# Altium PCB FPGA_Rack_v1_0.PcbDoc (part 2 of 5)
Units mil, origin at the board's own origin, x right, y up, seen from the top; angles counter-clockwise.
Board outline 6299.21 x 3937.01 mil, 8 copper layers (Top Layer, Top, Internal Plane 2, Vcc 3.3V, Internal Plane 1, Gnd, Mid-Layer 1, SIG1, Mid-Layer 2, SIG3, Mid-Layer 3, SIG2, Mid-Layer 4, SIG4, Bottom Layer, Bottom), stack 74.2 mil thick; 215 components, 379 nets, 1713 pads, 1076 vias.
Unrouted connection lines stored in the file: 1.
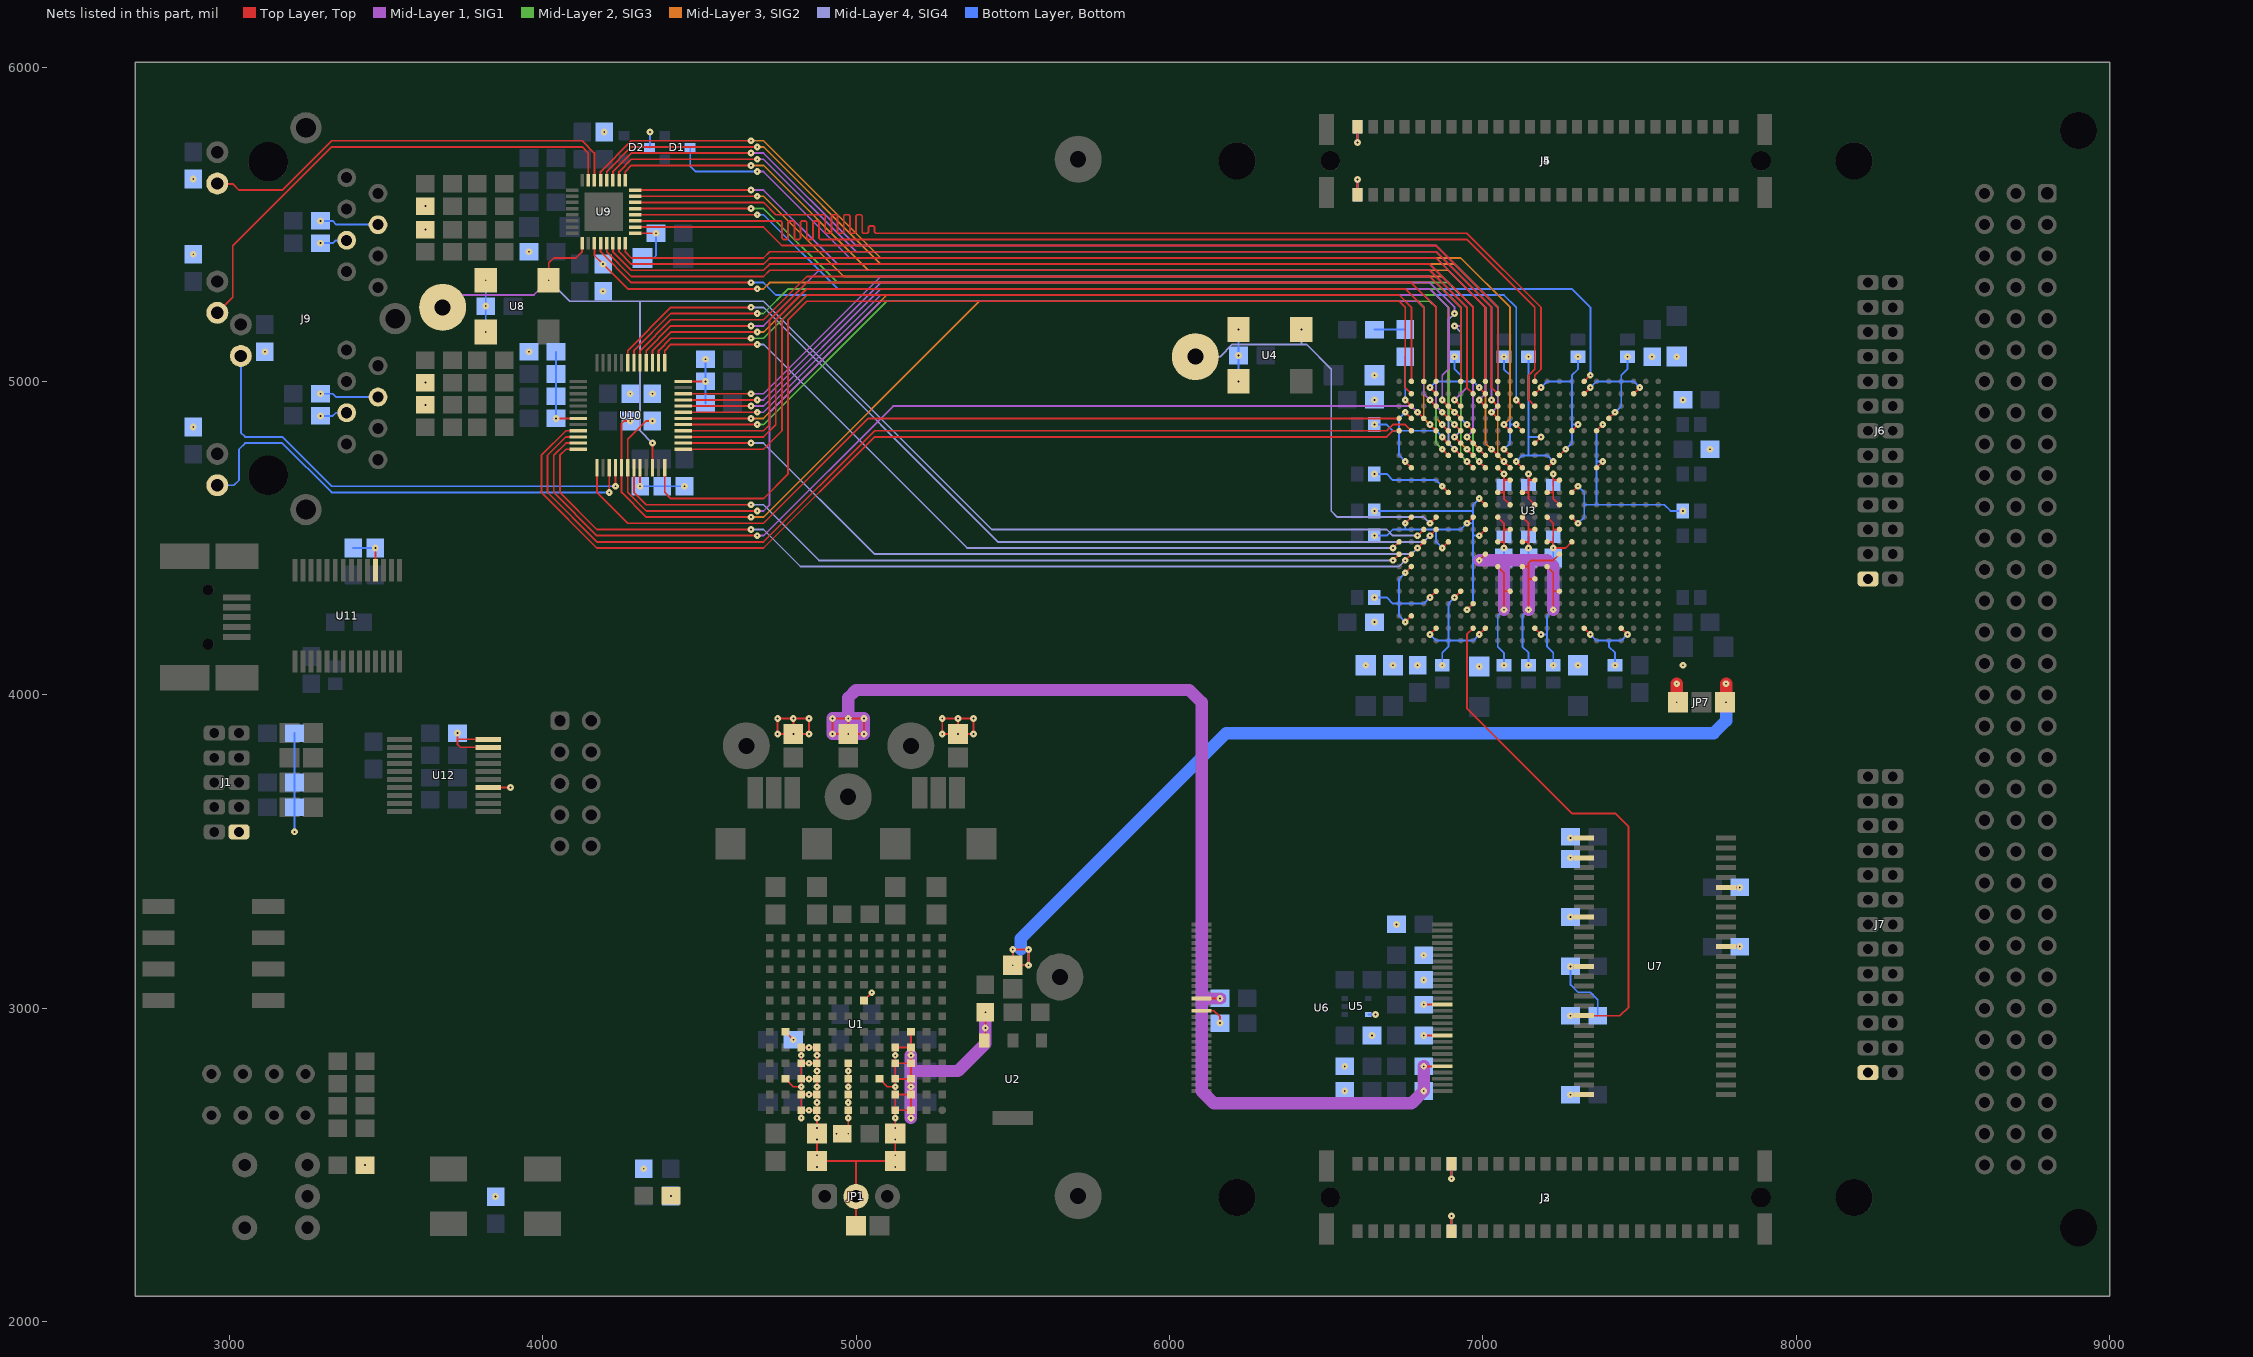
[diagram p8: the nets of this part, all layers, seen from the top]

## Footprints (in the part's own frame and the unit in brackets; to place one, negate y for a bottom-side part, rotate by r counter-clockwise, add the part's x,y. Pads: shape width x height; smd on the part's side, far side on the other; paste and mask are expansions set on the pad) (continued)
CONN2X5 [mil]
  rrect50% 60x60 hole 35.43: 1(0,0)
  round 60 hole 35.43: 2(0,-100) 3(-100,0) 4(-100,-100) 5(-200,0) 6(-200,-100) 7(-300,0) 8(-300,-100) 9(-400,0) 10(-400,-100)
  silkscreen extent -612,-237 213,138
CONN2X5-2MM-FCI-COUDE [mm]
  rrect50% 1.219x1.727 hole 0.8: 1(0,0) 2(0,2) 3(2,0) 4(2,2) 5(4,0) 6(4,2) 7(6,0) 8(6,2) 9(8,0) 10(8,2)
  silkscreen extent -2.3,-1.1 10.3,8.3
CONN3X32_DIN41612-3X32FC(Primary) [mil]
  rrect50% 60x60 hole 39.37: 1a(0,0)
  round 60 hole 35.43: 1b(-100,0) 1c(-200,0) 2a(0,-100) 2b(-100,-100) 2c(-200,-100) 3a(0,-200) 3b(-100,-200) 3c(-200,-200) 4a(0,-300) 4b(-100,-300) 4c(-200,-300) 5a(0,-400) 5b(-100,-400) 5c(-200,-400) 6a(0,-500) 6b(-100,-500) 6c(-200,-500) 7a(0,-600) 7b(-100,-600) 7c(-200,-600) 8a(0,-700) 8b(-100,-700) 8c(-200,-700) 9a(0,-800) 9b(-100,-800) 9c(-200,-800) 10a(0,-900) 10b(-100,-900) 10c(-200,-900) 11a(0,-1000) 11b(-100,-1000) 11c(-200,-1000) 12a(0,-1100) 12b(-100,-1100) 12c(-200,-1100) 13a(0,-1200) 13b(-100,-1200) 13c(-200,-1200) 14a(0,-1300) 14b(-100,-1300) 14c(-200,-1300) 15a(0,-1400) 15b(-100,-1400) 15c(-200,-1400) 16a(0,-1500) 16b(-100,-1500) 16c(-200,-1500) 17a(0,-1600) 17b(-100,-1600) 17c(-200,-1600) 18a(0,-1700) 18b(-100,-1700) 18c(-200,-1700) 19a(0,-1800) 19b(-100,-1800) 19c(-200,-1800) 20a(0,-1900) 20b(-100,-1900) 20c(-200,-1900) 21a(0,-2000) 21b(-100,-2000) 21c(-200,-2000) 22a(0,-2100) 22b(-100,-2100) 22c(-200,-2100) 23a(0,-2200) 23b(-100,-2200) 23c(-200,-2200) 24a(0,-2300) 24b(-100,-2300) 24c(-200,-2300) 25a(0,-2400) 25b(-100,-2400) 25c(-200,-2400) 26a(0,-2500) 26b(-100,-2500) 26c(-200,-2500) 27a(0,-2600) 27b(-100,-2600) 27c(-200,-2600) 28a(0,-2700) 28b(-100,-2700) 28c(-200,-2700) 29a(0,-2800) 29b(-100,-2800) 29c(-200,-2800) 30a(0,-2900) 30b(-100,-2900) 30c(-200,-2900) 31a(0,-3000) 31b(-100,-3000) 31c(-200,-3000) 32a(0,-3100) 32b(-100,-3100) 32c(-200,-3100)
  round 118.11 hole 118.11 paste-1000 mask-1000: 97(100,200) 98(100,-3300)
  silkscreen extent -244,-3412 512,312
ERNI-SMC-50P-FD_ERNI-SMC-50P-FD(Primary) [mm]
  rect 2.5x1.2 smd: 51(-2.55,17.75) 52(2.55,17.75) 53(-2.55,-17.75) 54(2.55,-17.75)
  round 1.6 hole 1.6 paste-25.4 mask-25.4: 55(0,17.45) 56(0,-17.45)
  rect 1.1x0.8 smd: a1(-2.75,15.24) a2(-2.75,13.97) a3(-2.75,12.7) a4(-2.75,11.43) a5(-2.75,10.16) a6(-2.75,8.89) a7(-2.75,7.62) a8(-2.75,6.35) a9(-2.75,5.08) a10(-2.75,3.81) a11(-2.75,2.54) a12(-2.75,1.27) a13(-2.75,0) a14(-2.75,-1.27) a15(-2.75,-2.54) a16(-2.75,-3.81) a17(-2.75,-5.08) a18(-2.75,-6.35) a19(-2.75,-7.62) a20(-2.75,-8.89) a21(-2.75,-10.16) a22(-2.75,-11.43) a23(-2.75,-12.7) a24(-2.75,-13.97) a25(-2.75,-15.24) b1(2.75,15.24) b2(2.75,13.97) b3(2.75,12.7) b4(2.75,11.43) b5(2.75,10.16) b6(2.75,8.89) b7(2.75,7.62) b8(2.75,6.35) b9(2.75,5.08) b10(2.75,3.81) b11(2.75,2.54) b12(2.75,1.27) b13(2.75,0) b14(2.75,-1.27) b15(2.75,-2.54) b16(2.75,-3.81) b17(2.75,-5.08) b18(2.75,-6.35) b19(2.75,-7.62) b20(2.75,-8.89) b21(2.75,-10.16) b22(2.75,-11.43) b23(2.75,-12.7) b24(2.75,-13.97) b25(2.75,-15.24)
  silkscreen extent -4.13,-19.37 4.13,19.45
ERNI-SMC-50P-MD_ERNI-SMC-50P-MD(Primary) [mm]
  rect 2.5x1.2 smd: 51(2.55,17.75) 52(-2.55,17.75) 53(2.55,-17.75) 54(-2.55,-17.75)
  round 1.6 hole 1.6 paste-25.4 mask-25.4: 55(0,17.45) 56(0,-17.45)
  rect 1.1x0.8 smd: a1(2.75,15.24) a2(2.75,13.97) a3(2.75,12.7) a4(2.75,11.43) a5(2.75,10.16) a6(2.75,8.89) a7(2.75,7.62) a8(2.75,6.35) a9(2.75,5.08) a10(2.75,3.81) a11(2.75,2.54) a12(2.75,1.27) a13(2.75,0) a14(2.75,-1.27) a15(2.75,-2.54) a16(2.75,-3.81) a17(2.75,-5.08) a18(2.75,-6.35) a19(2.75,-7.62) a20(2.75,-8.89) a21(2.75,-10.16) a22(2.75,-11.43) a23(2.75,-12.7) a24(2.75,-13.97) a25(2.75,-15.24) b1(-2.75,15.24) b2(-2.75,13.97) b3(-2.75,12.7) b4(-2.75,11.43) b5(-2.75,10.16) b6(-2.75,8.89) b7(-2.75,7.62) b8(-2.75,6.35) b9(-2.75,5.08) b10(-2.75,3.81) b11(-2.75,2.54) b12(-2.75,1.27) b13(-2.75,0) b14(-2.75,-1.27) b15(-2.75,-2.54) b16(-2.75,-3.81) b17(-2.75,-5.08) b18(-2.75,-6.35) b19(-2.75,-7.62) b20(-2.75,-8.89) b21(-2.75,-10.16) b22(-2.75,-11.43) b23(-2.75,-12.7) b24(-2.75,-13.97) b25(-2.75,-15.24)
  silkscreen extent -3.97,-18.57 3.97,19.27
JUMPER3 [mil]
  rrect50% 80x80 hole 39.37: 1(0,0)
  round 80 hole 39.37: 2(100,0) 3(200,0)
  silkscreen extent -56,-56 256,56
JUMPER-SMD [mil]
  rect 63x63 smd: 1(0,0) 2(75,0)
  silkscreen extent -38,-38 112,38
JUMPER-SMD3 [mil]
  rect 64x64 smd: 1(-75,0) 2(0,0) 3(75,0)
  silkscreen extent -119,-44 119,44
L0805-MM [mil]
  rect 60x56 smd: 1(0,0) 2(86.61,0)
  silkscreen extent -39,-35 126,35
LED-569-010X-XXX [mil]
  round 60 hole 31.5: 1(543.75,66) 2(443.75,66) 3(343.75,66) 4(243.75,66) 5(543.75,-66) 6(443.75,-66) 7(343.75,-66) 8(243.75,-66)
  silkscreen extent -162,-144 600,144
LED_SMD0805-MM [mil]
  rect 56x60 smd: 1(0,0) 2(0,86.61)
  silkscreen extent -35,-39 35,126
LGA144_15X15MM [mm]
  round 0.63 smd: 1(0,0)
  rect 0.63x0.63 smd: 2(1.27,0) 3(2.54,0) 4(3.81,0) 5(5.08,0) 6(6.35,0) 7(7.62,0) 8(8.89,0) 9(10.16,0) 10(11.43,0) 11(12.7,0) 12(13.97,0) 13(0,1.27) 14(1.27,1.27) 15(2.54,1.27) 16(3.81,1.27) 17(5.08,1.27) 18(6.35,1.27) 19(7.62,1.27) 20(8.89,1.27) 21(10.16,1.27) 22(11.43,1.27) 23(12.7,1.27) 24(13.97,1.27) 25(0,2.54) 26(1.27,2.54) 27(2.54,2.54) 28(3.81,2.54) 29(5.08,2.54) 30(6.35,2.54) 31(7.62,2.54) 32(8.89,2.54) 33(10.16,2.54) 34(11.43,2.54) 35(12.7,2.54) 36(13.97,2.54) 37(0,3.81) 38(1.27,3.81) 39(2.54,3.81) 40(3.81,3.81) 41(5.08,3.81) 42(6.35,3.81) 43(7.62,3.81) 44(8.89,3.81) 45(10.16,3.81) 46(11.43,3.81) 47(12.7,3.81) 48(13.97,3.81) 49(0,5.08) 50(1.27,5.08) 51(2.54,5.08) 52(3.81,5.08) 53(5.08,5.08) 54(6.35,5.08) 55(7.62,5.08) 56(8.89,5.08) 57(10.16,5.08) 58(11.43,5.08) 59(12.7,5.08) 60(13.97,5.08) 61(0,6.35) 62(1.27,6.35) 63(2.54,6.35) 64(3.81,6.35) 65(5.08,6.35) 66(6.35,6.35) 67(7.62,6.35) 68(8.89,6.35) 69(10.16,6.35) 70(11.43,6.35) 71(12.7,6.35) 72(13.97,6.35) 73(0,7.62) 74(1.27,7.62) 75(2.54,7.62) 76(3.81,7.62) 77(5.08,7.62) 78(6.35,7.62) 79(7.62,7.62) 80(8.89,7.62) 81(10.16,7.62) 82(11.43,7.62) 83(12.7,7.62) 84(13.97,7.62) 85(0,8.89) 86(1.27,8.89) 87(2.54,8.89) 88(3.81,8.89) 89(5.08,8.89) 90(6.35,8.89) 91(7.62,8.89) 92(8.89,8.89) 93(10.16,8.89) 94(11.43,8.89) 95(12.7,8.89) 96(13.97,8.89) 97(0,10.16) 98(1.27,10.16) 99(2.54,10.16) 100(3.81,10.16) 101(5.08,10.16) 102(6.35,10.16) 103(7.62,10.16) 104(8.89,10.16) 105(10.16,10.16) 106(11.43,10.16) 107(12.7,10.16) 108(13.97,10.16) 109(0,11.43) 110(1.27,11.43) 111(2.54,11.43) 112(3.81,11.43) 113(5.08,11.43) 114(6.35,11.43) 115(7.62,11.43) 116(8.89,11.43) 117(10.16,11.43) 118(11.43,11.43) 119(12.7,11.43) 120(13.97,11.43) 121(0,12.7) 122(1.27,12.7) 123(2.54,12.7) 124(3.81,12.7) 125(5.08,12.7) 126(6.35,12.7) 127(7.62,12.7) 128(8.89,12.7) 129(10.16,12.7) 130(11.43,12.7) 131(12.7,12.7) 132(13.97,12.7) 133(0,13.97) 134(1.27,13.97) 135(2.54,13.97) 136(3.81,13.97) 137(5.08,13.97) 138(6.35,13.97) 139(7.62,13.97) 140(8.89,13.97) 141(10.16,13.97) 142(11.43,13.97) 143(12.7,13.97) 144(13.97,13.97)
  silkscreen extent -0.81,-0.81 14.78,14.78
LQFP48-P0.5-L7-C7 [mm]
  rect 1.4x0.25 smd: 1(0,0) 2(0,-0.5) 3(0,-1) 4(0,-1.5) 5(0,-2) 6(0,-2.5) 7(0,-3) 8(0,-3.5) 9(0,-4) 10(0,-4.5) 11(0,-5) 12(0,-5.5) 25(8.5,-5.5) 26(8.5,-5) 27(8.5,-4.5) 28(8.5,-4) 29(8.5,-3.5) 30(8.5,-3) 31(8.5,-2.5) 32(8.5,-2) 33(8.5,-1.5) 34(8.5,-1) 35(8.5,-0.5) 36(8.5,0)
  rect 0.25x1.4 smd: 13(1.5,-7) 14(2,-7) 15(2.5,-7) 16(3,-7) 17(3.5,-7) 18(4,-7) 19(4.5,-7) 20(5,-7) 21(5.5,-7) 22(6,-7) 23(6.5,-7) 24(7,-7) 37(7,1.5) 38(6.5,1.5) 39(6,1.5) 40(5.5,1.5) 41(5,1.5) 42(4.5,1.5) 43(4,1.5) 44(3.5,1.5) 45(3,1.5) 46(2.5,1.5) 47(2,1.5) 48(1.5,1.5)
  silkscreen extent -1.1,-8.1 9.6,2.6
NFE31P [mm]
  rect 1.27x2.54 smd: 1(0,0) 2(1.51,0) 3(3.02,0)
  silkscreen extent -1.02,-1.59 4.06,1.59
OSCILL-VX3 [mm]
  rect 1.8x2 smd: 1(0,0) 2(5.08,0) 3(5.08,4.2) 4(0,4.2)
  silkscreen extent -1.27,-1.27 6.35,5.4
PUSHBUTT-DTSM [mm]
  rect 3x2 smd: 1(0,0) 2(7.62,0) 3(0,-4.445) 4(7.62,-4.445)
  silkscreen extent -1.75,-5.71 9.37,1.27
PUSHBUTTON-03_PUSHBUTT-SH3-01(Primary) [mil]
  round 80 hole 39.37: 4(0,200) 5(200,200) C(100,0) NC(0,0) NO(200,0)
  silkscreen extent -50,-50 250,700
"QFN32 5X5" [mm]
  rect 1x0.28 smd: 1(0,0) 2(0,-0.5) 3(0,-1) 4(0,-1.5) 5(0,-2) 6(0,-2.5) 7(0,-3) 8(0,-3.5) 17(5.1,-3.5) 18(5.1,-3) 19(5.1,-2.5) 20(5.1,-2) 21(5.1,-1.5) 22(5.1,-1) 23(5.1,-0.5) 24(5.1,0)
  rect 0.28x1 smd: 9(0.8,-4.3) 10(1.3,-4.3) 11(1.8,-4.3) 12(2.3,-4.3) 13(2.8,-4.3) 14(3.3,-4.3) 15(3.8,-4.3) 16(4.3,-4.3) 25(4.3,0.8) 26(3.8,0.8) 27(3.3,0.8) 28(2.8,0.8) 29(2.3,0.8) 30(1.8,0.8) 31(1.3,0.8) 32(0.8,0.8)
  rect 3.1x3.1 smd: 33(2.55,-1.75)
  silkscreen extent -0.7,-5 5.8,1.5
RC0603-MM [mm]
  rect 1x1.2 smd: 1(0,0) 2(1.4,0)
  silkscreen extent -0.7,-0.8 2.1,0.8
RC0603/0805 [mm]
  rect 1.6x1.4 smd: 1(0,0) 2(2.064,0)
  silkscreen extent -0.95,-0.95 3.02,0.95
RC0805-MM [mil]
  rect 60x56 smd: 1(0,0) 2(86.61,0)
  silkscreen extent -39,-35 126,35
RJ45-PULSE-J8064D628ANL [mil]
  round 60 hole 35.43: 1(-450,675) 2(-400,775) 3(-350,675) 4(-300,775) 5(-250,675) 6(-200,775) 7(-150,675) 8(-100,775) 13(100,675) 14(150,775) 15(200,675) 16(250,775) 17(300,675) 18(350,775) 19(400,675) 20(450,775)
  round 70 hole 39.37: 9(-531.25,262.5) 10(-431.25,262.5) 11(-118.75,262.5) 12(-18.75,262.5) 21(18.75,337.5) 22(118.75,337.5) 23(431.25,262.5) 24(531.25,262.5)
  round 100 hole 63: 25(-609,545) 26(0,830) 27(609,545)
  round 125.98 hole 125.98 paste-1000 mask-1000: 28(-500,425) 29(500,425)
  silkscreen extent -669,-13 669,888
SC70-5 [mm]
  rect 0.5x0.4 smd: 1(0,0) 2(0,-0.65) 3(0,-1.3) 4(1.9,-1.3) 5(1.9,0)
  silkscreen extent -0.48,-1.91 2.38,0.64
SOT23 [mil]
  rect 35x30 smd: 1(0,0) 2(0,-75) 3(81.25,-37.5)
  silkscreen extent -25,-100 106,25
SOT223 [mil]
  rect 130x45 smd: 1(0,0)
  rect 35x45 smd: 2(-91,-248) 3(91,-248) 4(0,-248)
  silkscreen extent -132,-286 133,36
SSOP20 [mil]
  rect 80x16 smd: 1(0,0) 2(0,-25.59) 3(0,-51.18) 4(0,-76.77) 5(0,-102.36) 6(0,-127.95) 7(0,-153.54) 8(0,-179.13) 9(0,-204.72) 10(0,-230.32) 11(283.46,-230.32) 12(283.46,-204.72) 13(283.46,-179.13) 14(283.46,-153.54) 15(283.46,-127.95) 16(283.46,-102.36) 17(283.46,-76.77) 18(283.46,-51.18) 19(283.46,-25.59) 20(283.46,0)
  silkscreen extent -47,-276 331,47
SSOP28-P0.65-L10.2-C5.4 [mm]
  rect 1.8x0.4 smd: 1(0,0) 2(0,-0.65) 3(0,-1.3) 4(0,-1.95) 5(0,-2.6) 6(0,-3.25) 7(0,-3.9) 8(0,-4.55) 9(0,-5.2) 10(0,-5.85) 11(0,-6.5) 12(0,-7.15) 13(0,-7.8) 14(0,-8.45) 15(7.4,-8.45) 16(7.4,-7.8) 17(7.4,-7.15) 18(7.4,-6.5) 19(7.4,-5.85) 20(7.4,-5.2) 21(7.4,-4.55) 22(7.4,-3.9) 23(7.4,-3.25) 24(7.4,-2.6) 25(7.4,-1.95) 26(7.4,-1.3) 27(7.4,-0.65) 28(7.4,0)
  silkscreen extent -1.2,-9.6 8.6,1.2
SW-CTS-193-4MS [mm]
  rect 1.2x2.6 smd: 1(0,0) 2(2.54,0) 3(5.08,0) 4(7.62,0) 5(7.62,8.89) 6(5.08,8.89) 7(2.54,8.89) 8(0,8.89)
  silkscreen extent -2.7,-1.91 10.32,10.48
TC7343_CAPS7343P(TAJ-D)(Primary) [mil]
  rect 96x102 smd: MINUS(275,0) PLUS(0,0)
  silkscreen extent -75,-100 331,100
TSOP54 [mil]
  rect 64x16 smd: 1(0,0) 2(0,-31.5) 3(0,-62.99) 4(0,-94.49) 5(0,-125.98) 6(0,-157.48) 7(0,-188.98) 8(0,-220.47) 9(0,-251.97) 10(0,-283.46) 11(0,-314.96) 12(0,-346.46) 13(0,-377.95) 14(0,-409.45) 15(0,-440.94) 16(0,-472.44) 17(0,-503.94) 18(0,-535.43) 19(0,-566.93) 20(0,-598.43) 21(0,-629.92) 22(0,-661.42) 23(0,-692.91) 24(0,-724.41) 25(0,-755.91) 26(0,-787.4) 27(0,-818.9) 28(452.76,-818.9) 29(452.76,-787.4) 30(452.76,-755.91) 31(452.76,-724.41) 32(452.76,-692.91) 33(452.76,-661.42) 34(452.76,-629.92) 35(452.76,-598.43) 36(452.76,-566.93) 37(452.76,-535.43) 38(452.76,-503.94) 39(452.76,-472.44) 40(452.76,-440.94) 41(452.76,-409.45) 42(452.76,-377.95) 43(452.76,-346.46) 44(452.76,-314.96) 45(452.76,-283.46) 46(452.76,-251.97) 47(452.76,-220.47) 48(452.76,-188.98) 49(452.76,-157.48) 50(452.76,-125.98) 51(452.76,-94.49) 52(452.76,-62.99) 53(452.76,-31.5) 54(452.76,0)
  silkscreen extent -39,-870 492,51
TSOP56 [mil]
  rect 64x12 smd: 1(0,0) 2(0,-19.68) 3(0,-39.37) 4(0,-59.06) 5(0,-78.74) 6(0,-98.43) 7(0,-118.11) 8(0,-137.8) 9(0,-157.48) 10(0,-177.17) 11(0,-196.85) 12(0,-216.54) 13(0,-236.22) 14(0,-255.91) 15(0,-275.59) 16(0,-295.28) 17(0,-314.96) 18(0,-334.65) 19(0,-354.33) 20(0,-374.02) 21(0,-393.7) 22(0,-413.39) 23(0,-433.07) 24(0,-452.76) 25(0,-472.44) 26(0,-492.13) 27(0,-511.81) 28(0,-531.5) 29(767.72,-531.5) 30(767.72,-511.81) 31(767.72,-492.13) 32(767.72,-472.44) 33(767.72,-452.76) 34(767.72,-433.07) 35(767.72,-413.39) 36(767.72,-393.7) 37(767.72,-374.02) 38(767.72,-354.33) 39(767.72,-334.65) 40(767.72,-314.96) 41(767.72,-295.28) 42(767.72,-275.59) 43(767.72,-255.91) 44(767.72,-236.22) 45(767.72,-216.54) 46(767.72,-196.85) 47(767.72,-177.17) 48(767.72,-157.48) 49(767.72,-137.8) 50(767.72,-118.11) 51(767.72,-98.43) 52(767.72,-78.74) 53(767.72,-59.06) 54(767.72,-39.37) 55(767.72,-19.68) 56(767.72,0)
  silkscreen extent -39,-555 807,24
"UNCONNECTED NUT M2.5" [mm]
  round 3 hole 3 paste-25.4 mask-25.4: 1(0,0)
  Top Layer, Top keep-out region: -3.5,0 -3.031,-1.75 -1.75,-3.031 0,-3.5 1.75,-3.031 3.031,-1.75 3.5,0 3.031,1.75 1.75,3.031 0,3.5 -1.75,3.031 -3.031,1.75
  Bottom Layer, Bottom keep-out region: -3.5,0 -3.031,-1.75 -1.75,-3.031 0,-3.5 1.75,-3.031 3.031,-1.75 3.5,0 3.031,1.75 1.75,3.031 0,3.5 -1.75,3.031 -3.031,1.75
  silkscreen extent -3,-3 3,3
USB-MINI-B-SMD [mm]
  rect 2.25x0.5 smd: 1(8.225,1.6) 2(8.225,0.8) 3(8.225,0) 4(8.225,-0.8) 5(8.225,-1.6)
  rect 3.5x2.05 smd: 6(8.25,-4.925) 8(8.25,4.925)
  rect 4x2.05 smd: 7(4,-4.925) 9(4,4.925)
  round 0.9 hole 0.9 paste-25.4 mask-25.4: 10(5.9,2.2) 11(5.9,-2.2)
  Top Layer, Top keep-out lines w0.254: 2,-3.1 3.2,-3.1 3.2,3.1 2,3.1 2,-3.1
  silkscreen extent -0.3,-6.2 10.2,6.2

## Part data
C1 C2 C3 C4 C5 C6 C7 C10 C11 C12 C13 C14 C17 C18 C19 C20 C21 C22 C23 C24 C25 C26 C27 C28 C29 C30 C31 C32 C33 C34 C35 C36 C37 C38 C39 C40 C41 C42 C43 C44 C45 C46 C47 C48 C49 C50 C51 C52 C53 C54 C55 C56 C57 C58 C59 C60 C61 C62 C63 C64 C65 C66 C67 C68 C69 C70 C71 C72 C73 C74 C75 C76 C77 C78 C79 C80 C81 C82 C83 C84 C85 C86 C87 C88 C89 C90 C91 C92 C93 C94 C95 C96 C97 C98 C99 C100 C101 C102 C103 C104 C105 C106 C107: "Capacitor"
C8 C9: "Valable pour formats 0805 et 1206"
J2 J4: "Connecteur Smd serie SMC pas 1.27 ERNI - Distrelec 12 06 39"
J3 J5: "Connecteur Smd serie SMC pas 1.27 ERNI - Distrelec 12 06 42"
J9: "Integrated connector modules 10/100 base-TX belMag with LEDs .  Reselec N° 0810-1X1T-03"
J10: "Farnell no 1125-348 / Molex SD-67503-010"
L1 L2: "Self de choc SMD - Murata"
LC1 LC2: "EMI filter - TDK"
LD1: "Led smd - Stanley Distrelec N° 25 31 00"
LD2: "LED Schurter - Distrelec 25 09 08..."
R1 R2 R3 R4 R5 R6: "Valable pour format 0805 et 1206"
R39: "Resistor"
S1: "ITW Switches JPM 1990-0101 / Distrelec 20 15 40"
S2: "Pushbutton NO Schurter type SMS J-leads"
SW1: "Dip switch smd 4 poles - Thomas & Betts - Distrelec 21 04 21"
U2: "3A Low Dropout positive Regulator"
U4 U8: "Oscillator serie VX3 - Jauch - Distrelec 68 03 82 .. 68 04 00"
U5: "HS Inverter - Fairchild"
U6 U7: "SDRAM 64Mb x 16 - Micron"
U9: "Quadrature Decoder/Counter interface ICs - Agilent Technologies"
U11: "24-Bit ADC with Ultra Low Noise PGIA - Crystal"
U12: "+/- 15kV ESD-Protected, 1uA, 1Mbps, 3.0V to 5.5V, RS-232 Transceiver with AutoShutdown Plus"

## Via types
v1: diameter 21.65, hole 5.91, Top Layer, Top to Bottom Layer, Bottom, 1076 vias

## Nets (pads, with @x,y where several pads share a name; then routed paths per layer and width w, separated by ;. In a path a pad name is that pad's centre, name@x,y a point inside that pad or via, vN(x,y) a via of type N, cw(c..) or ccw(c..) an arc to the next point about the centre after c; other vN are vias at no path point)
1.2V: C23.2 C28.2 C29.2 C34.2 C36.2 C37.2 C42.2 C47.2 C52.2 C57.2 C58.2 JP5.2 U3.J8 U3.J10 U3.J12 U3.J14 U3.K9 U3.K11 U3.K13 U3.L10 U3.L12 U3.L14 U3.M9 U3.M11 U3.M13 U3.N10 U3.N12 U3.N14 U3.P9 U3.P11 U3.P13 U3.R14 | length 1627.8
  Top Layer, Top w5.91: U3.J14@7047.24,4488.19 7066.93,4488.19 ; U3.L14@7047.24,4566.93 7066.93,4547.24 7066.93,4527.56 ; U3.N14@7047.24,4645.67 7066.93,4645.67 ; U3.R14@7047.24,4724.41 v1(7066.93,4704.72) 7066.93,4685.04 ; v1(7066.93,4468.5) 7066.93,4488.19 ; U3.K13@7086.61,4527.56 7066.93,4527.56 ; U3.M13@7086.61,4606.3 7066.93,4625.98 7066.93,4645.67 ; U3.P13@7086.61,4685.04 7066.93,4685.04 ; U3.J12@7125.98,4488.19 7145.67,4488.19 ; U3.L12@7125.98,4566.93 7145.67,4547.24 7145.67,4527.56 ; U3.N12@7125.98,4645.67 7145.67,4645.67 ; v1(7145.67,4468.5) 7145.67,4488.19 ; v1(7145.67,4704.72) 7145.67,4685.04 ; U3.K11@7165.35,4527.56 7145.67,4527.56 ; U3.M11@7165.35,4606.3 7145.67,4625.98 7145.67,4645.67 ; U3.P11@7165.35,4685.04 7145.67,4685.04 ; U3.J10@7204.72,4488.19 7224.41,4488.19 ; U3.L10@7204.72,4566.93 7224.41,4547.24 7224.41,4527.56 ; U3.N10@7204.72,4645.67 7224.41,4645.67 ; v1(7224.41,4704.72) 7224.41,4685.04 ; U3.K9@7244.09,4527.56 7224.41,4527.56 ; U3.M9@7244.09,4606.3 7224.41,4625.98 7224.41,4645.67 ; U3.P9@7244.09,4685.04 7224.41,4685.04 ; U3.J8@7283.46,4488.19 7263.78,4468.5 v1(7224.41,4468.5) 7224.41,4488.19 ; v1(5325,3875) v1(5325,3925) ; v1(5325,3875) v1(5275,3875) v1(5275,3925) v1(5325,3925) ; v1(5325,3875) v1(5375,3875) v1(5375,3925) v1(5325,3925) ; 7066.93,4488.19 7066.93,4527.56 ; 7066.93,4645.67 7066.93,4685.04 ; 7145.67,4488.19 7145.67,4527.56 ; 7145.67,4645.67 7145.67,4685.04 ; 7224.41,4488.19 7224.41,4527.56 ; 7224.41,4645.67 7224.41,4685.04
  Bottom Layer, Bottom w5.91: C29.2@7066.93,4437.01 v1(7066.93,4468.5) C37.2@7066.93,4503.94 ; C52.2@7066.93,4669.29 v1(7066.93,4704.72) ; C36.2@7145.67,4437.01 v1(7145.67,4468.5) C42.2@7145.67,4503.94 ; C57.2@7145.67,4669.29 v1(7145.67,4704.72) ; C34.2@7224.41,4437.01 v1(7224.41,4468.5) C47.2@7224.41,4503.94 ; C58.2@7224.41,4669.29 v1(7224.41,4704.72)
  other v1: 6988.19,4090.55 7303.15,4094.49
1.8V: C62.2 C64.2 C66.2 JP3.2 U6.13 U6.33 | length 4157.1
  Top Layer, Top w5.91: U6.13@6102.36,3031.5 v1(6161.42,3031.5) ; v1(6811.02,2814.96) U6.33@6870.08,2814.96 ; v1(4975,3875) v1(4975,3925) ; v1(4975,3875) v1(4925,3875) v1(4925,3925) v1(4975,3925) ; v1(4975,3875) v1(5025,3875) v1(5025,3925) v1(4975,3925)
  Mid-Layer 1, SIG1 w39.37: v1(6161.42,3031.5) 6102.36,3031.5 ; v1(6811.02,2814.96) v1(6811.02,2736.22) 6771.65,2696.85 6141.73,2696.85 6102.36,2736.22 6102.36,3031.5 ; v1(4975,3875) v1(4975,3925) ; v1(4975,3875) v1(4925,3875) v1(4925,3925) v1(4975,3925) ; v1(4975,3875) v1(5025,3875) v1(5025,3925) v1(4975,3925) ; v1(4975,3925) 4975,3990.75 5000,4015.75 6062.99,4015.75 6102.36,3976.38 6102.36,3031.5
2.5V: JP6.2 JP7.1 | length 3144.9
  Top Layer, Top w5.91: v1(5500,3137.5) v1(5550,3137.5) v1(5550,3187.5) v1(5500,3187.5) v1(5500,3137.5)
  Top Layer, Top w39.37: JP7.1@7771.85,3976.38 v1(7775.59,3976.38) v1(7775.59,4035.43)
  Bottom Layer, Bottom w5.91: 5525,3137.5 5525,3187.5 ; 5525,3137.5 v1(5550,3137.5) v1(5550,3187.5) 5525,3187.5 ; 5525,3137.5 v1(5500,3137.5) v1(5500,3187.5) 5525,3187.5
  Bottom Layer, Bottom w39.37: 5525,3187.5 5525,3221.85 6181.1,3877.95 7736.22,3877.95 7775.59,3917.32 v1(7775.59,3976.38)
3.3V: C3.2 C24.2 C25.2 C26.2 C27.2 C30.2 C31.2 C32.2 C33.2 C35.2 C38.2 C39.2 C40.2 C41.2 C43.2 C44.2 C45.2 C46.2 C48.2 C49.2 C50.2 C51.2 C53.2 C54.2 C55.2 C56.2 C60.2 C61.2 C63.2 C65.2 C67.2 C68.2 C69.2 C70.2 C71.2 C72.2 C73.2 C76.1 C77.1 C81.1 C82.2 C83.2 C89.1 C90.1 C91.2 C92.2 C93.2 C96.2 C97.2 C98.2 C100.2 C101.2 C107.2 D2.3 J1.1 J2.a7 J2.b7 J3.a7 J3.b7 J4.a1 J4.b1 J5.a1 J5.b1 J6.25 J7.25 J9.4 J9.5 J9.16 J9.17 JP4.2 JP7.3 L1.2 L2.2 R9.1 R10.2 R11.2 R12.2 R13.1 R15.2 R20.2 R21.2 R22.2 R24.2 R25.2 R26.2 R27.2 R28.2 R29.2 R30.2 R31.2 R32.2 R37.2 R38.2 R40.2 R41.2 R46.2 R47.2 R49.2 R50.2 U1.68 U1.73 U1.74 U1.75 U1.76 U3.AA3 U3.AA7 U3.AA11 U3.AA15 U3.AA19 U3.B4 U3.B7 U3.B11 U3.B15 U3.B19 U3.C21 U3.D16 U3.E9 U3.E13 U3.E17 U3.E19 U3.F11 U3.G10 U3.G12 U3.G14 U3.G21 U3.H9 U3.H15 U3.J18 U3.K15 U3.L8 U3.L16 U3.L21 U3.M15 U3.N8 U3.N18 U3.R6 U3.R10 U3.R12 U3.R21 U3.T9 U3.T13 U3.U11 U3.U18 U3.V6 U3.V8 U3.V12 U3.V16 U3.W5 U3.W21 U4.1 U4.4 U5.5 U6.15 U6.38 U6.43 U7.1 U7.3 U7.9 U7.14 U7.27 U7.43 U7.49 U8.1 U8.4 U9.17 U10.32 U10.48 U11.4 U12.14 U12.19 U12.20 | length 12689.6
  Top Layer, Top w5.91: U11.4@3466.54,4397.64 v1(3466.54,4468.5) ; v1(3728.35,3877.95) 3728.35,3858.27 ; U12.14@3826.77,3704.72 v1(3897.64,3704.72) ; U12.19@3826.77,3832.68 3738.19,3832.68 3728.35,3842.52 3728.35,3858.27 ; U12.20@3826.77,3858.27 3728.35,3858.27 ; U9.17@4295.28,5472.44 v1(4362.2,5472.44) ; v1(4311.02,4665.35) U10.32@4311.02,4724.41 ; U10.48@4448.82,5000 v1(4519.69,5000) ; v1(4937.5,2600) C3.2@4956.25,2600 v1(4975,2600) v1(4975,2650) U1.73@4975,2675 v1(4975,2700) U1.74@4975,2725 v1(4975,2750) U1.75@4975,2775 v1(4975,2800) U1.76@4975,2825 ; U1.68@5025,3025 v1(5050,3050) ; U6.15@6102.36,2992.13 6141.73,2992.13 6161.42,2972.44 v1(6161.42,2952.76) ; J4.a1@6600,5595.23 v1(6600,5643.75) ; v1(6600,5762.5) J4.b1@6600,5811.77 ; v1(6751.97,4232.28) U3.C21@6771.65,4251.97 ; v1(6751.97,4389.76) U3.G21@6771.65,4409.45 ; v1(6751.97,4547.24) U3.L21@6771.65,4566.93 ; v1(6751.97,4744.09) U3.R21@6771.65,4724.41 ; v1(6751.97,4901.57) U3.W21@6771.65,4881.89 ; v1(6811.02,2913.39) U6.38@6870.08,2913.39 ; v1(6811.02,3011.81) U6.43@6870.08,3011.81 ; v1(6830.71,4192.91) U3.B19@6850.39,4212.6 ; v1(6830.71,4311.02) U3.E19@6850.39,4330.71 ; v1(6830.71,4980.31) U3.AA19@6850.39,4960.63 ; v1(6870.08,4468.5) U3.J18@6889.76,4488.19 ; v1(6870.08,4665.35) U3.N18@6889.76,4645.67 ; v1(6870.08,4822.83) U3.U18@6889.76,4803.15 ; J2.a7@6900,2288.23 v1(6900,2337.5) ; v1(6900,2456.25) J2.b7@6900,2504.77 ; v1(6909.45,4311.02) U3.E17@6929.13,4330.71 ; v1(6948.82,4271.65) U3.D16@6968.5,4291.34 ; v1(6948.82,4547.24) U3.L16@6968.5,4566.93 ; v1(6948.82,4862.2) U3.V16@6968.5,4842.52 ; v1(6988.19,4192.91) U3.B15@7007.87,4212.6 ; v1(6988.19,4429.13) U3.H15@7007.87,4448.82 ; v1(6988.19,4507.87) U3.K15@7007.87,4527.56 ; v1(6988.19,4625.98) U3.M15@7007.87,4606.3 ; v1(6988.19,4980.31) U3.AA15@7007.87,4960.63 ; U3.G14@7047.24,4409.45 7066.93,4389.76 7066.93,4330.71 ; v1(7066.93,4271.65) 7066.93,4330.71 ; v1(7066.93,4783.46) U3.T13@7086.61,4763.78 ; U3.E13@7086.61,4330.71 7066.93,4330.71 ; v1(7106.3,4744.09) U3.R12@7125.98,4724.41 ; v1(7106.3,4862.2) U3.V12@7125.98,4842.52 ; U3.G12@7125.98,4409.45 7145.67,4409.45 ; v1(7145.67,4271.65) 7145.67,4370.08 ; U3.B11@7165.35,4212.6 v1(7185.04,4192.91) ; U3.F11@7165.35,4370.08 7145.67,4370.08 ; U3.U11@7165.35,4803.15 v1(7185.04,4822.83) ; U3.AA11@7165.35,4960.63 v1(7185.04,4980.31) ; U3.G10@7204.72,4409.45 7224.41,4389.76 7224.41,4330.71 ; U3.R10@7204.72,4724.41 v1(7224.41,4744.09) ; v1(7224.41,4271.65) 7224.41,4330.71 ; U3.E9@7244.09,4330.71 7224.41,4330.71 ; U3.H9@7244.09,4448.82 7224.41,4429.13 7153.54,4429.13 7145.67,4421.26 7145.67,4409.45 ; U3.T9@7244.09,4763.78 v1(7263.78,4783.46) ; v1(7279.53,2724.41) U7.27@7322.83,2724.41 ; v1(7279.53,3133.86) U7.14@7322.83,3133.86 ; v1(7279.53,3291.34) U7.9@7322.83,3291.34 ; v1(7279.53,3480.32) U7.3@7322.83,3480.32 ; v1(7279.53,3543.31) U7.1@7322.83,3543.31 ; U3.L8@7283.46,4566.93 v1(7303.15,4547.24) ; U3.N8@7283.46,4645.67 v1(7303.15,4665.35) ; U3.V8@7283.46,4842.52 v1(7303.15,4862.2) ; U3.B7@7322.83,4212.6 v1(7342.52,4192.91) ; U3.AA7@7322.83,4960.63 v1(7342.52,4980.31) ; U3.R6@7362.2,4724.41 v1(7381.89,4744.09) ; U3.V6@7362.2,4842.52 v1(7381.89,4862.2) ; U3.W5@7401.57,4881.89 v1(7421.26,4901.57) ; U3.B4@7440.94,4212.6 v1(7460.63,4192.91) ; U3.AA3@7480.31,4960.63 v1(7500,4980.31) ; U7.43@7775.59,3196.85 v1(7818.9,3196.85) ; U7.49@7775.59,3385.83 v1(7818.9,3385.83) ; v1(4800,3875) v1(4800,3925) ; v1(4800,3875) v1(4750,3875) v1(4750,3925) v1(4800,3925) ; v1(4800,3875) v1(4850,3875) v1(4850,3925) v1(4800,3925) ; 7145.67,4370.08 7145.67,4409.45
  Top Layer, Top w39.37: v1(7618.11,4035.43) v1(7618.11,3976.38) JP7.3@7621.85,3976.38
  Mid-Layer 1, SIG1 w39.37: v1(6988.19,4429.13) 7066.93,4429.13 ; v1(7066.93,4271.65) 7066.93,4429.13 ; v1(7145.67,4271.65) 7145.67,4429.13 ; v1(7224.41,4271.65) 7224.41,4409.45 7204.72,4429.13 7145.67,4429.13 ; 7066.93,4429.13 7145.67,4429.13
  Bottom Layer, Bottom w5.91: v1(3208.66,3562.99) R10.2@3208.66,3641.73 R11.2@3208.66,3720.47 R12.2@3208.66,3877.95 ; v1(3291.34,4889.76) 3330.71,4889.76 3340.94,4900 J9.17@3375,4900 ; v1(3291.34,4960.63) 3330.71,4960.63 3341.34,4950 J9.16@3475,4950 ; v1(3291.34,5440.94) 3330.71,5440.94 3339.76,5450 J9.5@3375,5450 ; v1(3291.34,5511.81) 3330.71,5511.81 3342.52,5500 J9.4@3475,5500 ; C100.2@3395.67,4468.5 v1(3466.54,4468.5) ; v1(3818.9,5157.48) v1(3818.9,5240.16) v1(3818.9,5322.83) ; R20.2@3850,2399.11 v1(3850,2400) ; v1(4311.02,4665.35) C97.2@4381.89,4665.35 v1(4452.76,4665.35) ; C83.2@4318.9,5393.7 4354.33,5393.7 4362.2,5401.57 v1(4362.2,5472.44) ; D2.3@4341.09,5746.16 4342.52,5746.16 v1(4342.52,5795.28) ; C93.2@4519.69,4929.13 v1(4519.69,5000) v1(4519.69,5070.87) ; v1(6220.47,5000) v1(6220.47,5082.68) v1(6220.47,5165.35) ; J5.a1@6600,5595.23 v1(6600,5643.75) ; v1(6600,5762.5) J5.b1@6600,5811.77 ; U5.5@6633.86,2980.32 v1(6657.48,2980.32) ; v1(6653.54,4311.02) 6692.91,4311.02 6712.6,4291.34 6732.28,4291.34 ; v1(6653.54,4507.87) 6692.91,4507.87 6712.6,4527.56 6751.97,4527.56 ; v1(6653.54,4586.61) 6968.5,4586.61 ; v1(6653.54,4704.72) 6692.91,4704.72 6712.6,4685.04 6850.39,4685.04 v1(6870.08,4665.35) ; v1(6653.54,4862.2) 6692.91,4862.2 6712.6,4842.52 6732.28,4842.52 ; v1(6751.97,4232.28) 6732.28,4251.97 6732.28,4291.34 ; v1(6751.97,4389.76) 6732.28,4370.08 6732.28,4291.34 ; v1(6751.97,4547.24) 6751.97,4527.56 ; v1(6751.97,4744.09) 6732.28,4763.78 6732.28,4842.52 ; v1(6751.97,4901.57) 6732.28,4881.89 6732.28,4842.52 ; v1(6830.71,4192.91) 6850.39,4173.23 6889.76,4173.23 ; v1(6830.71,4311.02) 6811.02,4291.34 6732.28,4291.34 ; v1(6830.71,4980.31) 6850.39,5000 6929.13,5000 ; v1(6870.08,4094.49) 6870.08,4133.86 6889.76,4153.54 6889.76,4173.23 ; v1(6870.08,4468.5) 6850.39,4488.19 6850.39,4527.56 ; v1(6870.08,4822.83) 6850.39,4842.52 6732.28,4842.52 ; J3.a7@6900,2288.23 v1(6900,2337.5) ; v1(6900,2456.25) J3.b7@6900,2504.77 ; v1(6909.45,4311.02) 6889.76,4291.34 6889.76,4173.23 ; v1(6909.45,5078.74) 6909.45,5039.37 6929.13,5019.69 6929.13,5000 ; v1(6948.82,4271.65) 6968.5,4291.34 6968.5,4429.13 ; v1(6948.82,4862.2) 6929.13,4881.89 6929.13,5000 ; v1(6988.19,4192.91) 6968.5,4173.23 6889.76,4173.23 ; v1(6988.19,4429.13) 6968.5,4429.13 ; v1(6988.19,4507.87) 6968.5,4507.87 ; v1(6988.19,4625.98) 6968.5,4606.3 6968.5,4586.61 ; v1(6988.19,4980.31) 6968.5,5000 6929.13,5000 ; v1(7066.93,4094.49) 7066.93,4133.86 7047.24,4153.54 7047.24,4251.97 v1(7066.93,4271.65) ; v1(7066.93,4783.46) 7086.61,4803.15 7086.61,4862.2 ; v1(7066.93,5078.74) 7066.93,5039.37 7086.61,5019.69 7086.61,4862.2 ; v1(7106.3,4744.09) 7125.98,4763.78 7145.67,4763.78 ; v1(7106.3,4862.2) 7086.61,4862.2 ; v1(7145.67,4094.49) 7145.67,4133.86 7125.98,4153.54 7125.98,4251.97 v1(7145.67,4271.65) ; v1(7145.67,5078.74) 7145.67,4822.83 ; v1(7185.04,4192.91) 7204.72,4192.91 ; v1(7185.04,4822.83) 7145.67,4822.83 ; v1(7185.04,4980.31) 7204.72,5000 7283.46,5000 ; v1(7224.41,4094.49) 7224.41,4133.86 7204.72,4153.54 7204.72,4192.91 ; v1(7224.41,4271.65) 7204.72,4251.97 7204.72,4192.91 ; v1(7224.41,4744.09) 7204.72,4763.78 7145.67,4763.78 ; v1(7263.78,4783.46) 7283.46,4803.15 7283.46,4862.2 ; v1(7279.53,3133.86) 7279.53,3074.8 7303.15,3051.18 7342.52,3051.18 7366.14,3027.56 R28.2@7366.14,2976.38 ; C68.2@7279.53,3476.38 v1(7279.53,3480.32) ; v1(7279.53,3543.31) C67.2@7279.53,3547.24 ; v1(7303.15,4547.24) 7322.83,4566.93 7322.83,4606.3 ; v1(7303.15,4665.35) 7322.83,4645.67 7322.83,4606.3 ; v1(7303.15,4862.2) 7283.46,4862.2 ; v1(7303.15,5078.74) 7303.15,5039.37 7283.46,5019.69 7283.46,5000 ; v1(7342.52,4192.91) 7362.2,4173.23 7401.57,4173.23 ; v1(7342.52,4980.31) 7362.2,5000 7440.94,5000 ; v1(7381.89,4744.09) 7362.2,4744.09 ; v1(7381.89,4862.2) 7362.2,4842.52 7362.2,4744.09 ; v1(7421.26,4094.49) 7421.26,4133.86 7401.57,4153.54 7401.57,4173.23 ; v1(7421.26,4901.57) 7440.94,4921.26 7440.94,5000 ; v1(7460.63,4192.91) 7440.94,4173.23 7401.57,4173.23 ; v1(7460.63,5078.74) 7460.63,5039.37 7440.94,5019.69 7440.94,5000 ; v1(7500,4980.31) 7480.31,5000 7440.94,5000 ; v1(7637.8,4586.61) 7598.43,4586.61 7578.74,4606.3 7362.2,4606.3 ; 6751.97,4527.56 6850.39,4527.56 ; 6850.39,4527.56 6929.13,4527.56 v1(6948.82,4547.24) 6968.5,4547.24 ; 6968.5,4429.13 6968.5,4507.87 ; 6968.5,4507.87 6968.5,4547.24 ; 6968.5,4547.24 6968.5,4586.61 ; 7145.67,4763.78 7145.67,4822.83 ; 7283.46,4862.2 7283.46,5000 ; 7322.83,4606.3 7362.2,4606.3 ; 7362.2,4606.3 7362.2,4744.09
  other v1: 4322.83,2488.19 3433.07,2500 6559.06,2736.22 6559.06,2814.96 6645.67,2913.39 6811.02,3090.55 6811.02,3169.29 6724.41,3267.72 6625.98,4094.49 6712.6,4094.49 6791.34,4094.49 7637.8,4094.49 6653.54,4232.28 7724.41,4783.46 2885.83,4854.33 3625.98,4925.2 6653.54,4940.94 7637.8,4940.94 4279.53,4960.63 4350.39,4960.63 3625.98,4996.06 6653.54,5019.69 7539.37,5078.74 7618.11,5078.74 3114.17,5094.49 3956.69,5094.49 4192.91,5287.4 2885.83,5405.51 3956.69,5413.39 3625.98,5484.25 3625.98,5559.06 2885.83,5645.67 4196.85,5795.28
5.0V: C1.2 C2.2 C4.2 C5.2 C6.2 JP1.2 JP2.1 U1.25 U1.26 U1.27 U1.28 U1.29 U1.30 U1.37 U1.38 U1.39 U1.40 U1.41 U1.51 U1.97 U1.98 U1.99 U1.100 U1.101 U1.109 U1.110 U1.111 U1.112 U1.113 U1.123 U2.3 | length 3004.2
  Top Layer, Top w5.91: U1.123@4775,2775 4800,2750 v1(4825,2750) ; v1(4825,2650) U1.109@4825,2675 ; v1(4875,2493.75) C1.2@4875,2512.5 ; JP2.1@5000,2306.25 JP1.2@5000,2400 5000,2512.5 ; U1.51@5075,2775 5100,2750 v1(5125,2750) ; v1(5125,2493.75) C2.2@5125,2512.5 ; v1(5175,2650) U1.25@5175,2675 ; U1.30@5175,2925 U1.29@5175,2875 ; U2.3@5409,2898 5412.5,2901.5 v1(5412.5,2937.5) v1(5412.5,2987.5) ; U1.109@4825,2675 U1.110@4825,2725 ; U1.109@4825,2675 v1(4850,2675) U1.97@4875,2675 ; U1.110@4825,2725 v1(4850,2725) U1.98@4875,2725 ; U1.110@4825,2725 v1(4825,2750) ; v1(4825,2750) U1.111@4825,2775 ; U1.111@4825,2775 v1(4850,2775) U1.99@4875,2775 ; U1.111@4825,2775 U1.112@4825,2825 ; U1.112@4825,2825 v1(4850,2825) U1.100@4875,2825 ; U1.112@4825,2825 v1(4825,2850) U1.113@4825,2875 v1(4850,2875) U1.101@4875,2875 v1(4875,2850) U1.100@4875,2825 ; C1.2@4875,2512.5 v1(4875,2531.25) v1(4875,2581.25) C4.2@4875,2600 v1(4875,2618.75) v1(4875,2650) U1.97@4875,2675 ; C1.2@4875,2512.5 5000,2512.5 ; U1.97@4875,2675 v1(4875,2700) U1.98@4875,2725 ; U1.98@4875,2725 v1(4875,2750) U1.99@4875,2775 ; U1.99@4875,2775 v1(4875,2800) U1.100@4875,2825 ; 5000,2512.5 C2.2@5125,2512.5 ; C2.2@5125,2512.5 v1(5125,2531.25) v1(5125,2581.25) C5.2@5125,2600 v1(5125,2618.75) v1(5125,2650) U1.37@5125,2675 ; U1.37@5125,2675 U1.38@5125,2725 ; U1.37@5125,2675 U1.25@5175,2675 ; U1.38@5125,2725 U1.26@5175,2725 ; U1.38@5125,2725 v1(5125,2750) ; v1(5125,2750) U1.39@5125,2775 ; U1.39@5125,2775 U1.27@5175,2775 ; U1.39@5125,2775 U1.40@5125,2825 ; U1.40@5125,2825 U1.28@5175,2825 ; U1.40@5125,2825 v1(5125,2850) U1.41@5125,2875 U1.29@5175,2875 ; U1.25@5175,2675 U1.26@5175,2725 ; U1.26@5175,2725 v1(5175,2750) U1.27@5175,2775 ; U1.27@5175,2775 U1.28@5175,2825 ; U1.28@5175,2825 v1(5175,2850) U1.29@5175,2875
  Mid-Layer 1, SIG1 w39.37: v1(5175,2650) v1(5175,2750) 5175,2800 ; v1(5175,2850) 5175,2800 ; v1(5412.5,2987.5) v1(5412.5,2937.5) 5412.5,2887.5 5325,2800 5175,2800
A3.3V: C86.2 C87.2 C88.2 L2.1 U10.19 | length 283.5
  Top Layer, Top w5.91: v1(4043.31,4881.89) U10.19@4114.17,4881.89
  Bottom Layer, Bottom w5.91: v1(4043.31,4881.89) C86.2@4043.31,4952.76 C87.2@4043.31,5023.62 L2.1@4043.31,5094.49
CCLK_1: C59.2 R8.1 | length 98.4
  Bottom Layer, Bottom w5.91: C59.2@6653.54,5165.35 R8.1@6751.97,5165.35
CCLK_2: R8.2 U3.Y21 | length 165.6
  Top Layer, Top w5.91: v1(6751.97,4940.94) U3.Y21@6771.65,4921.26
  Bottom Layer, Bottom w5.91: v1(6751.97,4940.94) R8.2@6751.97,5078.74
CLK_25M: PT8.1 U3.K20 U8.3 U9.9 U10.34 | length 4263.8
  Top Layer, Top w5.91: U8.3@4018.9,5322.83 v1(4019.68,5322.83) 4019.68,5377.95 4035.43,5393.7 4106.3,5393.7 4125.98,5413.39 U9.9@4125.98,5440.94 ; U10.34@4350.39,4724.41 v1(4350.39,4803.15) ; v1(6791.34,4507.87) U3.K20@6811.02,4527.56
  Mid-Layer 1, SIG1 w5.91: PT8.1@3681.1,5236.22 3720.47,5275.59 3972.44,5275.59 v1(4019.68,5322.83)
  Mid-Layer 4, SIG4 w5.91: v1(4019.68,5322.83) 4086.61,5255.91 4311.02,5255.91 ; v1(4350.39,4803.15) 4311.02,4842.52 4311.02,5255.91 ; v1(6791.34,4507.87) 6712.6,4507.87 6692.91,4527.56 5433.07,4527.56 4704.72,5255.91 4311.02,5255.91
CLK_106_25M: PT7.1 U3.L19 U4.3 | length 1341.9
  Top Layer, Top w5.91: U4.3@6420.47,5165.35 v1(6421.26,5165.35) ; v1(6830.71,4547.24) U3.L19@6850.39,4566.93
  Mid-Layer 4, SIG4 w5.91: PT7.1@6082.68,5078.74 6161.42,5078.74 6200.79,5118.11 6421.26,5118.11 ; v1(6421.26,5165.35) 6421.26,5118.11 ; v1(6830.71,4547.24) 6811.02,4566.93 6535.43,4566.93 6515.75,4586.61 6515.75,5039.37 6437.01,5118.11 6421.26,5118.11
CS_SDRAM_N: R28.1 U3.B16 U7.19 | length 1707.6
  Top Layer, Top w5.91: U3.B16@6968.5,4212.6 6948.82,4192.91 6948.82,3956.69 7283.46,3622.05 7421.26,3622.05 7464.57,3578.74 7464.57,3003.94 7437.01,2976.38 U7.19@7322.83,2976.38 v1(7279.53,2976.38)
DONE_LED: LD1.1 R14.1
  other v1: 4409.45,2401.57
ETH0_COL: U3.R13 U9.28 | length 3642.8
  Top Layer, Top w5.91: U9.28@4204.72,5641.73 4204.72,5669.29 4283.46,5748.03 v1(4685.04,5748.03) ; v1(7066.93,4744.09) U3.R13@7086.61,4724.41
  Mid-Layer 3, SIG2 w5.91: v1(4685.04,5748.03) 4704.72,5748.03 5078.74,5374.02 6909.45,5374.02 7047.24,5236.22 7047.24,4763.78 v1(7066.93,4744.09)
ETH0_CRS: U3.V13 U9.29 | length 3600.1
  Top Layer, Top w5.91: U9.29@4185.04,5641.73 4185.04,5669.29 4283.46,5767.72 v1(4665.35,5767.72) ; v1(7066.93,4862.2) U3.V13@7086.61,4842.52
  Mid-Layer 3, SIG2 w5.91: v1(4665.35,5767.72) 4704.72,5767.72 5078.74,5393.7 6929.13,5393.7 7086.61,5236.22 7086.61,4881.89 v1(7066.93,4862.2)
ETH0_INTRP: U3.R15 U9.21 | length 3331.8
  Top Layer, Top w5.91: U9.21@4295.28,5551.18 v1(4665.35,5551.18) ; v1(6988.19,4744.09) U3.R15@7007.87,4724.41
  Mid-Layer 2, SIG3 w5.91: v1(4665.35,5551.18) 4704.72,5551.18 4940.94,5314.96 6889.76,5314.96 6968.5,5236.22 6968.5,4763.78 v1(6988.19,4744.09)
ETH0_LED1: J9.10 U9.30 | length 1379.7
  Top Layer, Top w5.91: J9.10@2962.5,5631.25 2963.83,5629.92 3011.81,5629.92 3031.5,5610.24 3169.29,5610.24 3326.77,5767.72 4125.98,5767.72 4165.35,5728.35 U9.30@4165.35,5641.73
ETH0_LED2: J9.12 U9.31 | length 1593.8
  Top Layer, Top w5.91: J9.12@2962.5,5218.75 3011.81,5268.06 3011.81,5433.07 3326.77,5748.03 4125.98,5748.03 4145.67,5728.35 U9.31@4145.67,5641.73
ETH0_MDC: U3.Y12 U9.12 | length 3345.3
  Top Layer, Top w5.91: U9.12@4185.04,5440.94 4185.04,5413.39 4283.46,5314.96 v1(4665.35,5314.96) ; v1(7106.3,4940.94) U3.Y12@7125.98,4921.26
  Bottom Layer, Bottom w5.91: v1(4665.35,5314.96) 4704.72,5314.96 4744.09,5275.59 7066.93,5275.59 7106.3,5236.22 v1(7106.3,4940.94)
ETH0_MDIO: R32.1 U3.T16 U9.11 | length 3376.7
  Top Layer, Top w5.91: U9.11@4165.35,5440.94 4165.35,5401.57 v1(4192.91,5374.02) 4271.65,5295.28 v1(4685.04,5295.28) ; v1(6948.82,4783.46) U3.T16@6968.5,4763.78
  Mid-Layer 3, SIG2 w5.91: v1(4685.04,5295.28) 4704.72,5295.28 4724.41,5314.96 6850.39,5314.96 6929.13,5236.22 6929.13,4803.15 v1(6948.82,4783.46)
ETH0_RESET_N: D1.3 U3.Y15 | length 3114.3
  Top Layer, Top w5.91: v1(6988.19,4940.94) U3.Y15@7007.87,4921.26
  Mid-Layer 1, SIG1 w5.91: v1(4685.04,5669.29) 4704.72,5669.29 4980.31,5393.7 6850.39,5393.7 7007.87,5236.22 7007.87,4960.63 v1(6988.19,4940.94)
  Bottom Layer, Bottom w5.91: D1.3@4471.01,5746.16 4471.01,5686.47 4488.19,5669.29 v1(4685.04,5669.29)
ETH0_RX_CLK: U3.Y11 U9.19 | length 3672.1
  Top Layer, Top w5.91: U9.19@4295.28,5511.81 4759.84,5511.81 4763.78,5507.87 4763.78,5456.69 4767.72,5452.76 4779.53,5452.76 4783.46,5456.69 4783.46,5507.87 4787.4,5511.81 4799.21,5511.81 4803.15,5507.87 4803.15,5456.69 4807.09,5452.76 4818.9,5452.76 4822.83,5456.69 4822.83,5507.87 4826.77,5511.81 4838.58,5511.81 4842.52,5507.87 4842.52,5456.69 4846.46,5452.76 4858.27,5452.76 4862.2,5456.69 4862.2,5507.87 4866.14,5511.81 4877.95,5511.81 4881.89,5507.87 4881.89,5456.69 4885.83,5452.76 6948.82,5452.76 7165.35,5236.22 7165.35,5039.37 7145.67,5019.69 7145.67,4940.94 U3.Y11@7165.35,4921.26
ETH0_RX_DV: U3.AB14 U9.18 | length 3094.2
  Top Layer, Top w5.91: U9.18@4295.28,5492.13 4704.72,5492.13 4763.78,5433.07 6850.39,5433.07 7047.24,5236.22 U3.AB14@7047.24,5000
ETH0_RX_ER: U3.AB7 U9.20 | length 3413.9
  Top Layer, Top w5.91: U9.20@4295.28,5531.5 v1(4685.04,5531.5) ; U3.AB7@7322.83,5000 v1(7342.52,5019.69)
  Bottom Layer, Bottom w5.91: v1(4685.04,5531.5) 4704.72,5531.5 4940.94,5295.28 7283.46,5295.28 7342.52,5236.22 v1(7342.52,5019.69)
ETH0_RXD0: U3.AA14 U9.16 | length 3164.8
  Top Layer, Top w5.91: U9.16@4263.78,5440.94 4263.78,5413.39 4283.46,5393.7 4704.72,5393.7 4724.41,5413.39 6850.39,5413.39 7027.56,5236.22 7027.56,4980.31 U3.AA14@7047.24,4960.63
ETH0_RXD1: U3.AB15 U9.15 | length 3117.3
  Top Layer, Top w5.91: U9.15@4244.09,5440.94 4244.09,5413.39 4283.46,5374.02 4704.72,5374.02 4724.41,5393.7 6850.39,5393.7 7007.87,5236.22 U3.AB15@7007.87,5000
ETH0_RXD2: U3.AB16 U9.14 | length 3097.6
  Top Layer, Top w5.91: U9.14@4224.41,5440.94 4224.41,5413.39 4283.46,5354.33 4704.72,5354.33 4724.41,5374.02 6830.71,5374.02 6968.5,5236.22 U3.AB16@6968.5,5000
ETH0_RXD3: U3.AA16 U9.13 | length 3145.1
  Top Layer, Top w5.91: U9.13@4204.72,5440.94 4204.72,5413.39 4283.46,5334.65 4704.72,5334.65 4724.41,5354.33 6830.71,5354.33 6948.82,5236.22 6948.82,4980.31 U3.AA16@6968.5,4960.63
ETH0_TX_CLK: U3.AB11 U9.22 | length 3667.4
  Top Layer, Top w5.91: U9.22@4295.28,5570.87 4704.72,5570.87 4744.09,5531.5 4897.64,5531.5 4901.57,5527.56 4901.57,5476.38 4905.51,5472.44 4917.32,5472.44 4921.26,5476.38 4921.26,5527.56 4925.2,5531.5 4937.01,5531.5 4940.94,5527.56 4940.94,5476.38 4944.88,5472.44 4956.69,5472.44 4960.63,5476.38 4960.63,5527.56 4964.57,5531.5 4976.38,5531.5 4980.31,5527.56 4980.31,5476.38 4984.25,5472.44 4996.06,5472.44 5000,5476.38 5000,5527.56 5003.94,5531.5 5015.75,5531.5 5019.69,5527.56 5019.69,5476.38 5023.62,5472.44 5035.43,5472.44 5039.37,5476.38 5039.37,5492.13 5043.31,5496.06 5055.12,5496.06 5059.06,5492.13 5059.06,5476.38 5062.99,5472.44 6948.82,5472.44 7185.04,5236.22 7185.04,5039.37 7165.35,5019.69 U3.AB11@7165.35,5000
ETH0_TX_EN: U3.T15 U9.23 | length 3308.7
  Top Layer, Top w5.91: U9.23@4295.28,5590.55 v1(4685.04,5590.55) ; v1(6988.19,4783.46) U3.T15@7007.87,4763.78
  Mid-Layer 3, SIG2 w5.91: v1(4685.04,5590.55) 4704.72,5590.55 4960.63,5334.65 6870.08,5334.65 6968.5,5236.22 6968.5,4803.15 v1(6988.19,4783.46)
ETH0_TXD0: U3.U16 U9.24 | length 3277.5
  Top Layer, Top w5.91: U9.24@4295.28,5610.24 v1(4665.35,5610.24) ; v1(6948.82,4822.83) U3.U16@6968.5,4803.15
  Mid-Layer 1, SIG1 w5.91: v1(4665.35,5610.24) 4704.72,5610.24 4940.94,5374.02 6830.71,5374.02 6968.5,5236.22 6968.5,4842.52 v1(6948.82,4822.83)
ETH0_TXD1: U3.T14 U9.25 | length 3456.1
  Top Layer, Top w5.91: U9.25@4263.78,5641.73 4263.78,5669.29 4283.46,5688.98 v1(4665.35,5688.98) ; v1(7027.56,4783.46) U3.T14@7047.24,4763.78
  Mid-Layer 3, SIG2 w5.91: v1(4665.35,5688.98) 4704.72,5688.98 5039.37,5354.33 6889.76,5354.33 7007.87,5236.22 7007.87,4803.15 v1(7027.56,4783.46)
ETH0_TXD2: U3.Y14 U9.26 | length 3346.1
  Top Layer, Top w5.91: U9.26@4244.09,5641.73 4244.09,5669.29 4283.46,5708.66 v1(4685.04,5708.66) ; v1(7027.56,4940.94) U3.Y14@7047.24,4921.26
  Mid-Layer 1, SIG1 w5.91: v1(4685.04,5708.66) 4704.72,5708.66 5000,5413.39 6850.39,5413.39 7027.56,5236.22 v1(7027.56,4940.94)
ETH0_TXD3: U3.W14 U9.27 | length 3449.3
  Top Layer, Top w5.91: U9.27@4224.41,5641.73 4224.41,5669.29 4283.46,5728.35 v1(4665.35,5728.35) ; v1(7027.56,4901.57) U3.W14@7047.24,4881.89
  Mid-Layer 1, SIG1 w5.91: v1(4665.35,5728.35) 4704.72,5728.35 5000,5433.07 6850.39,5433.07 7047.24,5236.22 7047.24,4921.26 v1(7027.56,4901.57)
ETH1_CLK_OUT: U3.H21 U10.24 | length 3016
  Top Layer, Top w5.91: U10.24@4114.17,4783.46 4074.8,4783.46 4055.12,4763.78 4055.12,4645.67 4173.23,4527.56 v1(4665.35,4527.56) ; v1(6751.97,4429.13) U3.H21@6771.65,4448.82
  Mid-Layer 4, SIG4 w5.91: v1(4665.35,4527.56) 4704.72,4527.56 4822.83,4409.45 6732.28,4409.45 v1(6751.97,4429.13)
ETH1_COL: U3.V18 U10.42 | length 2991
  Top Layer, Top w5.91: U10.42@4448.82,4881.89 v1(4665.35,4881.89) ; v1(6870.08,4862.2) U3.V18@6889.76,4842.52
  Mid-Layer 3, SIG2 w5.91: v1(4665.35,4881.89) 4704.72,4881.89 5098.43,5275.59 6811.02,5275.59 6850.39,5236.22 6850.39,4881.89 v1(6870.08,4862.2)
ETH1_CRS: U3.AB19 U10.40 | length 3062.1
  Top Layer, Top w5.91: U10.40@4448.82,4842.52 4704.72,4842.52 4724.41,4862.2 4724.41,5196.85 4842.52,5314.96 6771.65,5314.96 6850.39,5236.22 U3.AB19@6850.39,5000
ETH1_GPIO1: U3.V22 U10.21 | length 3233.4
  Top Layer, Top w5.91: U10.21@4114.17,4842.52 4074.8,4842.52 3996.06,4763.78 3996.06,4645.67 4173.23,4468.5 4704.72,4468.5 5059.06,4822.83 6692.91,4822.83 6712.6,4842.52 U3.V22@6732.28,4842.52
ETH1_GPIO2: U3.V21 U10.22 | length 3225.2
  Top Layer, Top w5.91: U10.22@4114.17,4822.83 4074.8,4822.83 4015.75,4763.78 4015.75,4645.67 4173.23,4488.19 4704.72,4488.19 5059.06,4842.52 6692.91,4842.52 6712.6,4862.2 6751.97,4862.2 U3.V21@6771.65,4842.52
ETH1_GPIO3: U3.W20 U10.23 | length 3233.4
  Top Layer, Top w5.91: U10.23@4114.17,4803.15 4074.8,4803.15 4035.43,4763.78 4035.43,4645.67 4173.23,4507.87 v1(4685.04,4507.87) ; v1(6791.34,4901.57) U3.W20@6811.02,4881.89
  Mid-Layer 1, SIG1 w5.91: v1(4685.04,4507.87) 4704.72,4507.87 5118.11,4921.26 6771.65,4921.26 v1(6791.34,4901.57)
ETH1_GPIO4: U3.W22 U10.25 | length 2817.2
  Top Layer, Top w5.91: U10.25@4173.23,4724.41 4173.23,4645.67 4271.65,4547.24 4704.72,4547.24 5039.37,4881.89 U3.W22@6732.28,4881.89
ETH1_GPIO8: U3.AA21 U10.36 | length 3290.2
  Top Layer, Top w5.91: U10.36@4389.76,4724.41 4389.76,4645.67 4409.45,4625.98 4704.72,4625.98 4783.46,4704.72 4783.46,5196.85 4842.52,5255.91 6732.28,5255.91 6751.97,5236.22 6751.97,4980.31 U3.AA21@6771.65,4960.63
ETH1_GPIO9: U3.AB21 U10.37 | length 2986.8
  Top Layer, Top w5.91: U10.37@4448.82,4783.46 4704.72,4783.46 4763.78,4842.52 4763.78,5196.85 4842.52,5275.59 6732.28,5275.59 6771.65,5236.22 U3.AB21@6771.65,5000
ETH1_LED1: J9.22 U10.28 | length 1569.5
  Top Layer, Top w5.91: v1(4232.28,4665.35) U10.28@4232.28,4724.41
  Bottom Layer, Bottom w5.91: J9.22@3037.5,5081.25 3037.5,4836.52 3051.18,4822.83 3169.29,4822.83 3326.77,4665.35 v1(4232.28,4665.35)
ETH1_LED2: J9.24 U10.27 | length 1507.4
  Top Layer, Top w5.91: v1(4212.6,4645.67) U10.27@4212.6,4724.41
  Bottom Layer, Bottom w5.91: J9.24@2962.5,4668.75 3015.21,4668.75 3031.5,4685.04 3031.5,4783.46 3051.18,4803.15 3169.29,4803.15 3326.77,4645.67 v1(4212.6,4645.67)
ETH1_MDC: U3.H22 U10.31 | length 2617.5
  Top Layer, Top w5.91: U10.31@4291.34,4724.41 4291.34,4645.67 4330.71,4606.3 v1(4665.35,4606.3) ; v1(6712.6,4429.13) U3.H22@6732.28,4448.82
  Mid-Layer 4, SIG4 w5.91: v1(4665.35,4606.3) 4704.72,4606.3 4881.89,4429.13 v1(6712.6,4429.13)
ETH1_MDIO: R50.1 U3.Y19 U10.30 | length 3625.9
  Top Layer, Top w5.91: v1(4350.39,4874.02) 4330.71,4874.02 4271.65,4814.96 4271.65,4645.67 4330.71,4586.61 v1(4685.04,4586.61) ; v1(6830.71,4940.94) U3.Y19@6850.39,4921.26
  Mid-Layer 1, SIG1 w5.91: v1(4685.04,4586.61) 4704.72,4586.61 4724.41,4606.3 4724.41,4901.57 5078.74,5255.91 6791.34,5255.91 6811.02,5236.22 6811.02,4960.63 v1(6830.71,4940.94)
ETH1_PWR_DOWN_INT: U3.K19 U10.7 | length 3001.3
  Top Layer, Top w5.91: U10.7@4271.65,5059.06 4271.65,5098.43 4409.45,5236.22 v1(4665.35,5236.22) ; v1(6830.71,4507.87) U3.K19@6850.39,4527.56
  Mid-Layer 4, SIG4 w5.91: v1(4665.35,5236.22) 4704.72,5236.22 5452.76,4488.19 6811.02,4488.19 v1(6830.71,4507.87)
ETH1_RESET_N: R49.1 U3.V19 U10.29 | length 3546.5
  Top Layer, Top w5.91: v1(4279.53,4874.02) 4259.84,4874.02 4251.97,4866.14 U10.29@4251.97,4724.41 4251.97,4645.67 4330.71,4566.93 v1(4665.35,4566.93) ; v1(6830.71,4862.2) U3.V19@6850.39,4842.52
  Mid-Layer 3, SIG2 w5.91: v1(4665.35,4566.93) 4704.72,4566.93 5393.7,5255.91 6791.34,5255.91 6811.02,5236.22 6811.02,4881.89 v1(6830.71,4862.2)
ETH1_RX_CLK: U3.J20 U10.38 | length 2525.3
  Top Layer, Top w5.91: U10.38@4448.82,4803.15 v1(4665.35,4803.15) ; v1(6791.34,4468.5) U3.J20@6811.02,4488.19
  Mid-Layer 4, SIG4 w5.91: v1(4665.35,4803.15) 4704.72,4803.15 5059.06,4448.82 6771.65,4448.82 v1(6791.34,4468.5)
ETH1_RX_DV: U3.AB20 U10.39 | length 3014.6
  Top Layer, Top w5.91: U10.39@4448.82,4822.83 4704.72,4822.83 4744.09,4862.2 4744.09,5196.85 4842.52,5295.28 6751.97,5295.28 6811.02,5236.22 U3.AB20@6811.02,5000
ETH1_RX_ER: U3.T18 U10.41 | length 3061.6
  Top Layer, Top w5.91: U10.41@4448.82,4862.2 v1(4685.04,4862.2) ; v1(6870.08,4783.46) U3.T18@6889.76,4763.78
  Mid-Layer 2, SIG3 w5.91: v1(4685.04,4862.2) 4704.72,4862.2 5098.43,5255.91 6830.71,5255.91 6850.39,5236.22 6850.39,4803.15 v1(6870.08,4783.46)
ETH1_RXD0: U3.U17 U10.46 | length 3153.2
  Top Layer, Top w5.91: U10.46@4448.82,4960.63 v1(4665.35,4960.63) ; v1(6909.45,4822.83) U3.U17@6929.13,4803.15
  Mid-Layer 1, SIG1 w5.91: v1(4665.35,4960.63) 4704.72,4960.63 5078.74,5334.65 6830.71,5334.65 6929.13,5236.22 6929.13,5177.17 v1(6909.45,5177.17)
  Mid-Layer 4, SIG4 w5.91: v1(6909.45,4822.83) 6929.13,4842.52 6929.13,5157.48 v1(6909.45,5177.17)
ETH1_RXD1: U3.T17 U10.45 | length 3145.1
  Top Layer, Top w5.91: U10.45@4448.82,4940.94 v1(4685.04,4940.94) ; v1(6909.45,4783.46) U3.T17@6929.13,4763.78
  Mid-Layer 1, SIG1 w5.91: v1(4685.04,4940.94) 4704.72,4940.94 5078.74,5314.96 6830.71,5314.96 6909.45,5236.22 v1(6909.45,5216.54)
  Mid-Layer 4, SIG4 w5.91: v1(6909.45,4783.46) 6889.76,4803.15 6889.76,5196.85 v1(6909.45,5216.54)
ETH1_RXD2: U3.Y18 U10.44 | length 2951.6
  Top Layer, Top w5.91: U10.44@4448.82,4921.26 v1(4665.35,4921.26) ; v1(6870.08,4940.94) U3.Y18@6889.76,4921.26
  Mid-Layer 1, SIG1 w5.91: v1(4665.35,4921.26) 4704.72,4921.26 5078.74,5295.28 6830.71,5295.28 6889.76,5236.22 6889.76,5039.37 6870.08,5019.69 v1(6870.08,4940.94)
ETH1_RXD3: U3.W18 U10.43 | length 2943.4
  Top Layer, Top w5.91: U10.43@4448.82,4901.57 v1(4685.04,4901.57) ; v1(6870.08,4901.57) U3.W18@6889.76,4881.89
  Mid-Layer 1, SIG1 w5.91: v1(4685.04,4901.57) 4704.72,4901.57 5078.74,5275.59 6811.02,5275.59 6850.39,5236.22 6850.39,4921.26 v1(6870.08,4901.57)
ETH1_TX_CLK: U3.J22 U10.1 | length 2667.3
  Top Layer, Top w5.91: U10.1@4389.76,5059.06 4389.76,5098.43 4409.45,5118.11 v1(4685.04,5118.11) ; v1(6712.6,4468.5) U3.J22@6732.28,4488.19
  Mid-Layer 4, SIG4 w5.91: v1(4685.04,5118.11) 4704.72,5118.11 5354.33,4468.5 v1(6712.6,4468.5)
ETH1_TX_EN: U3.V17 U10.2 | length 3058.8
  Top Layer, Top w5.91: U10.2@4370.08,5059.06 4370.08,5098.43 4409.45,5137.8 v1(4665.35,5137.8) ; v1(6909.45,4862.2) U3.V17@6929.13,4842.52
  Mid-Layer 2, SIG3 w5.91: v1(4665.35,5137.8) 4704.72,5137.8 4842.52,5275.59 6850.39,5275.59 6889.76,5236.22 6889.76,4881.89 v1(6909.45,4862.2)
ETH1_TXD0: U3.W17 U10.3 | length 3055.4
  Top Layer, Top w5.91: U10.3@4350.39,5059.06 4350.39,5098.43 4409.45,5157.48 v1(4685.04,5157.48) ; v1(6909.45,4901.57) U3.W17@6929.13,4881.89
  Mid-Layer 3, SIG2 w5.91: v1(4685.04,5157.48) 4704.72,5157.48 4842.52,5295.28 6830.71,5295.28 6889.76,5236.22 6889.76,4921.26 v1(6909.45,4901.57)
ETH1_TXD1: U3.Y17 U10.4 | length 3151.8
  Top Layer, Top w5.91: U10.4@4330.71,5059.06 4330.71,5098.43 4409.45,5177.17 v1(4665.35,5177.17) ; v1(6909.45,4940.94) U3.Y17@6929.13,4921.26
  Mid-Layer 1, SIG1 w5.91: v1(4665.35,5177.17) 4704.72,5177.17 4881.89,5354.33 6830.71,5354.33 6948.82,5236.22 6948.82,4980.31 v1(6909.45,4940.94)
ETH1_TXD2: U3.AB17 U10.5 | length 3032.3
  Top Layer, Top w5.91: U10.5@4311.02,5059.06 4311.02,5098.43 4409.45,5196.85 4704.72,5196.85 4842.52,5334.65 6830.71,5334.65 6929.13,5236.22 U3.AB17@6929.13,5000
ETH1_TXD3: U3.R16 U10.6 | length 3311.3
  Top Layer, Top w5.91: U10.6@4291.34,5059.06 4291.34,5098.43 4409.45,5216.54 v1(4685.04,5216.54) ; v1(6948.82,4744.09) U3.R16@6968.5,4724.41
  Mid-Layer 2, SIG3 w5.91: v1(4685.04,5216.54) 4704.72,5216.54 4783.46,5295.28 6870.08,5295.28 6929.13,5236.22 6929.13,4763.78 v1(6948.82,4744.09)
FB1: R6.2 U1.126 | length 35.4
  Top Layer, Top w5.91: U1.126@4775,2925 v1(4800,2900)